# Altium PCB board.PcbDoc
Units mm, origin at the board's own origin, x right, y up, seen from the top; angles counter-clockwise.
Board outline 110 x 110 mm, 2 copper layers (Top Layer, Bottom Layer); 9 components, 6 nets, 43 pads, 1 vias.
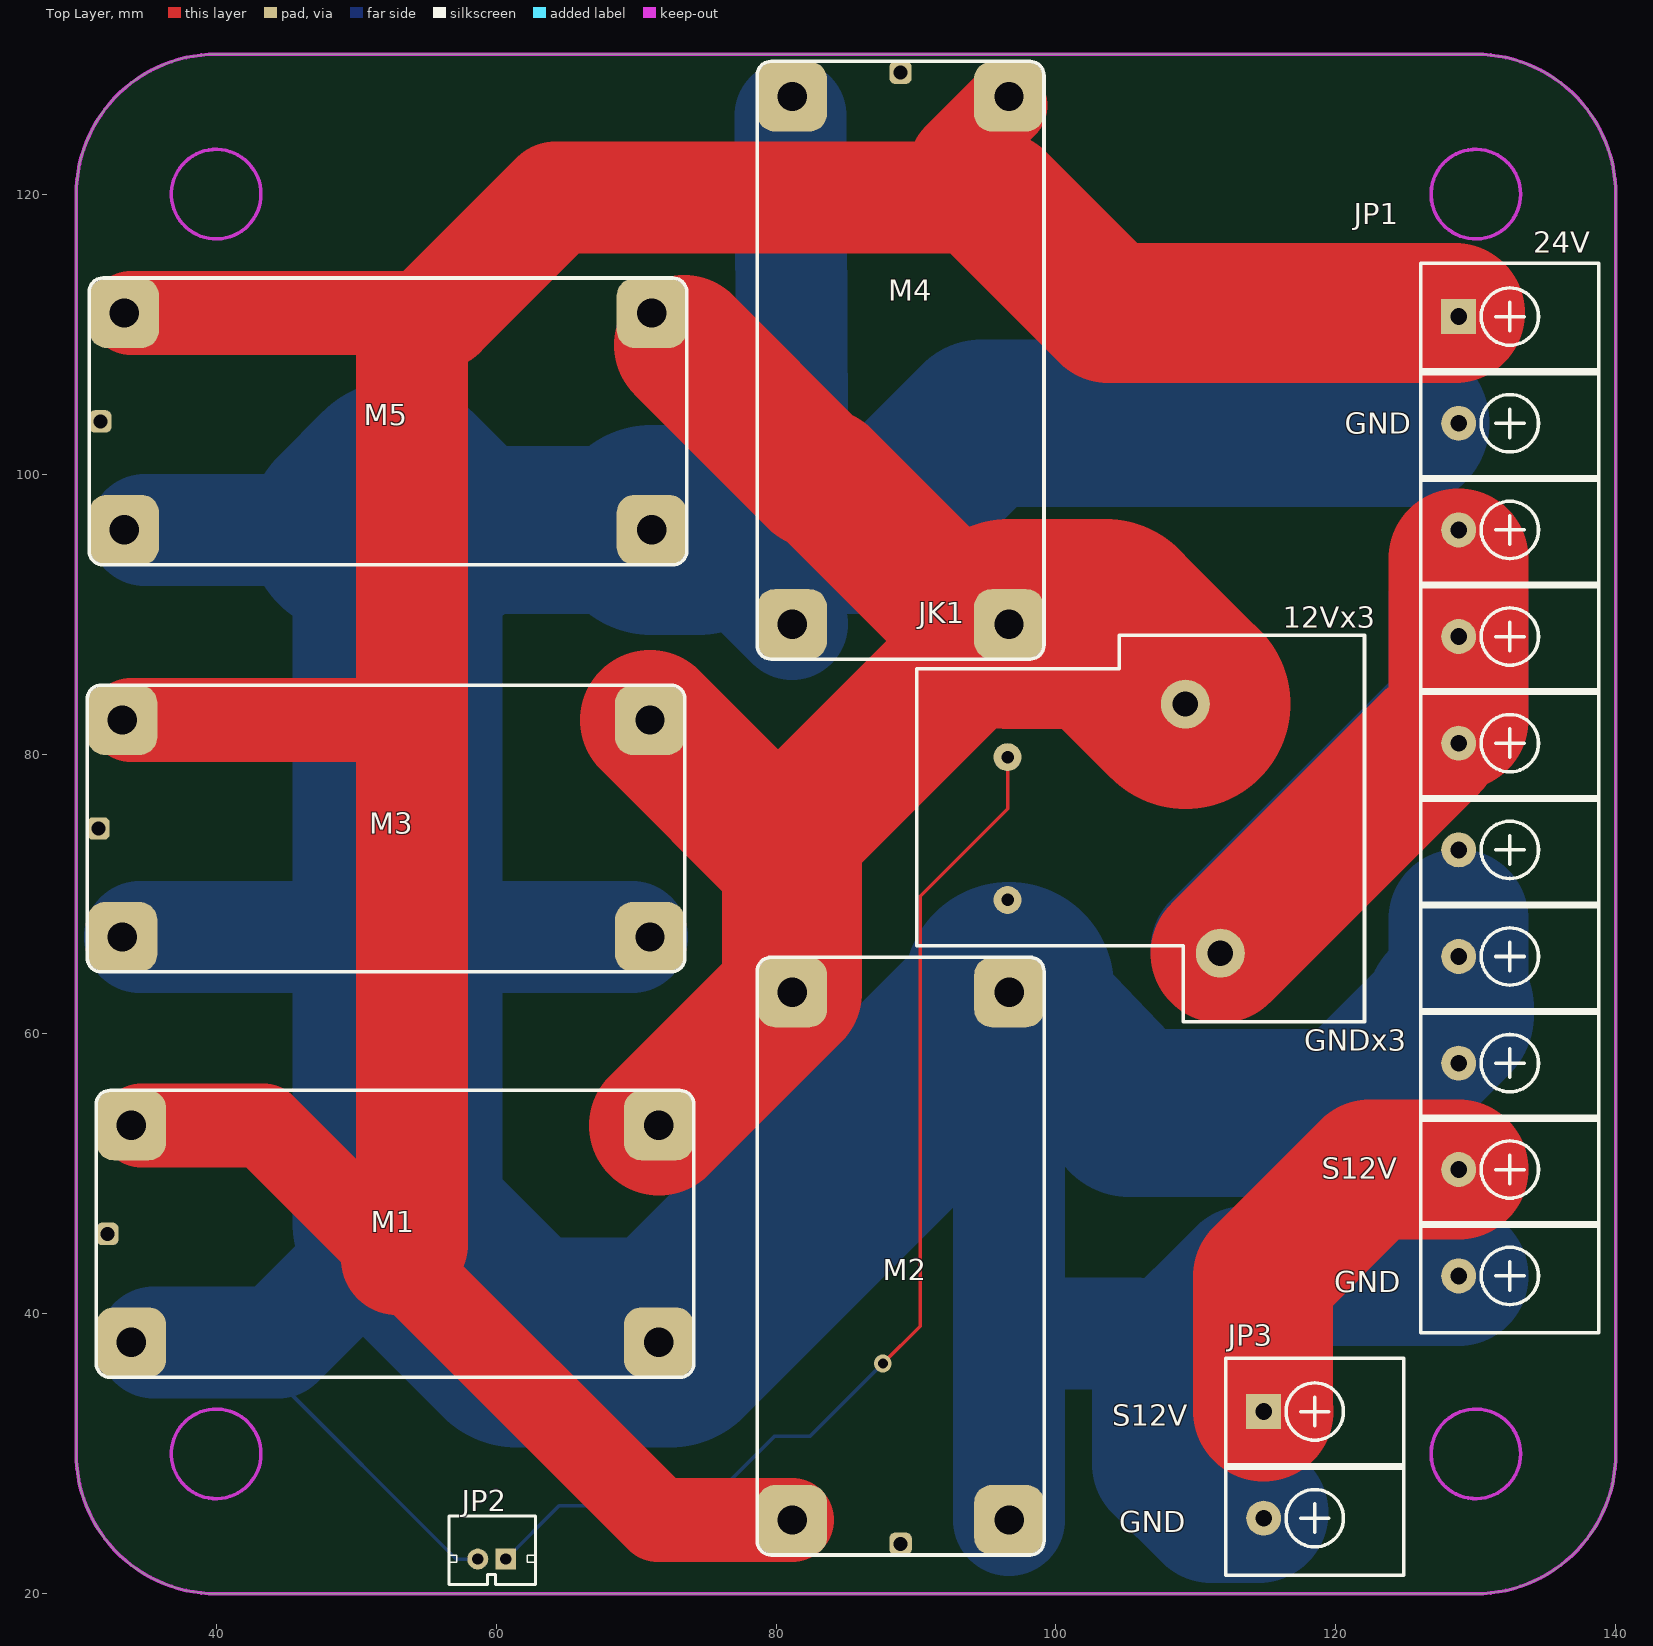
[diagram p0: Top Layer view]
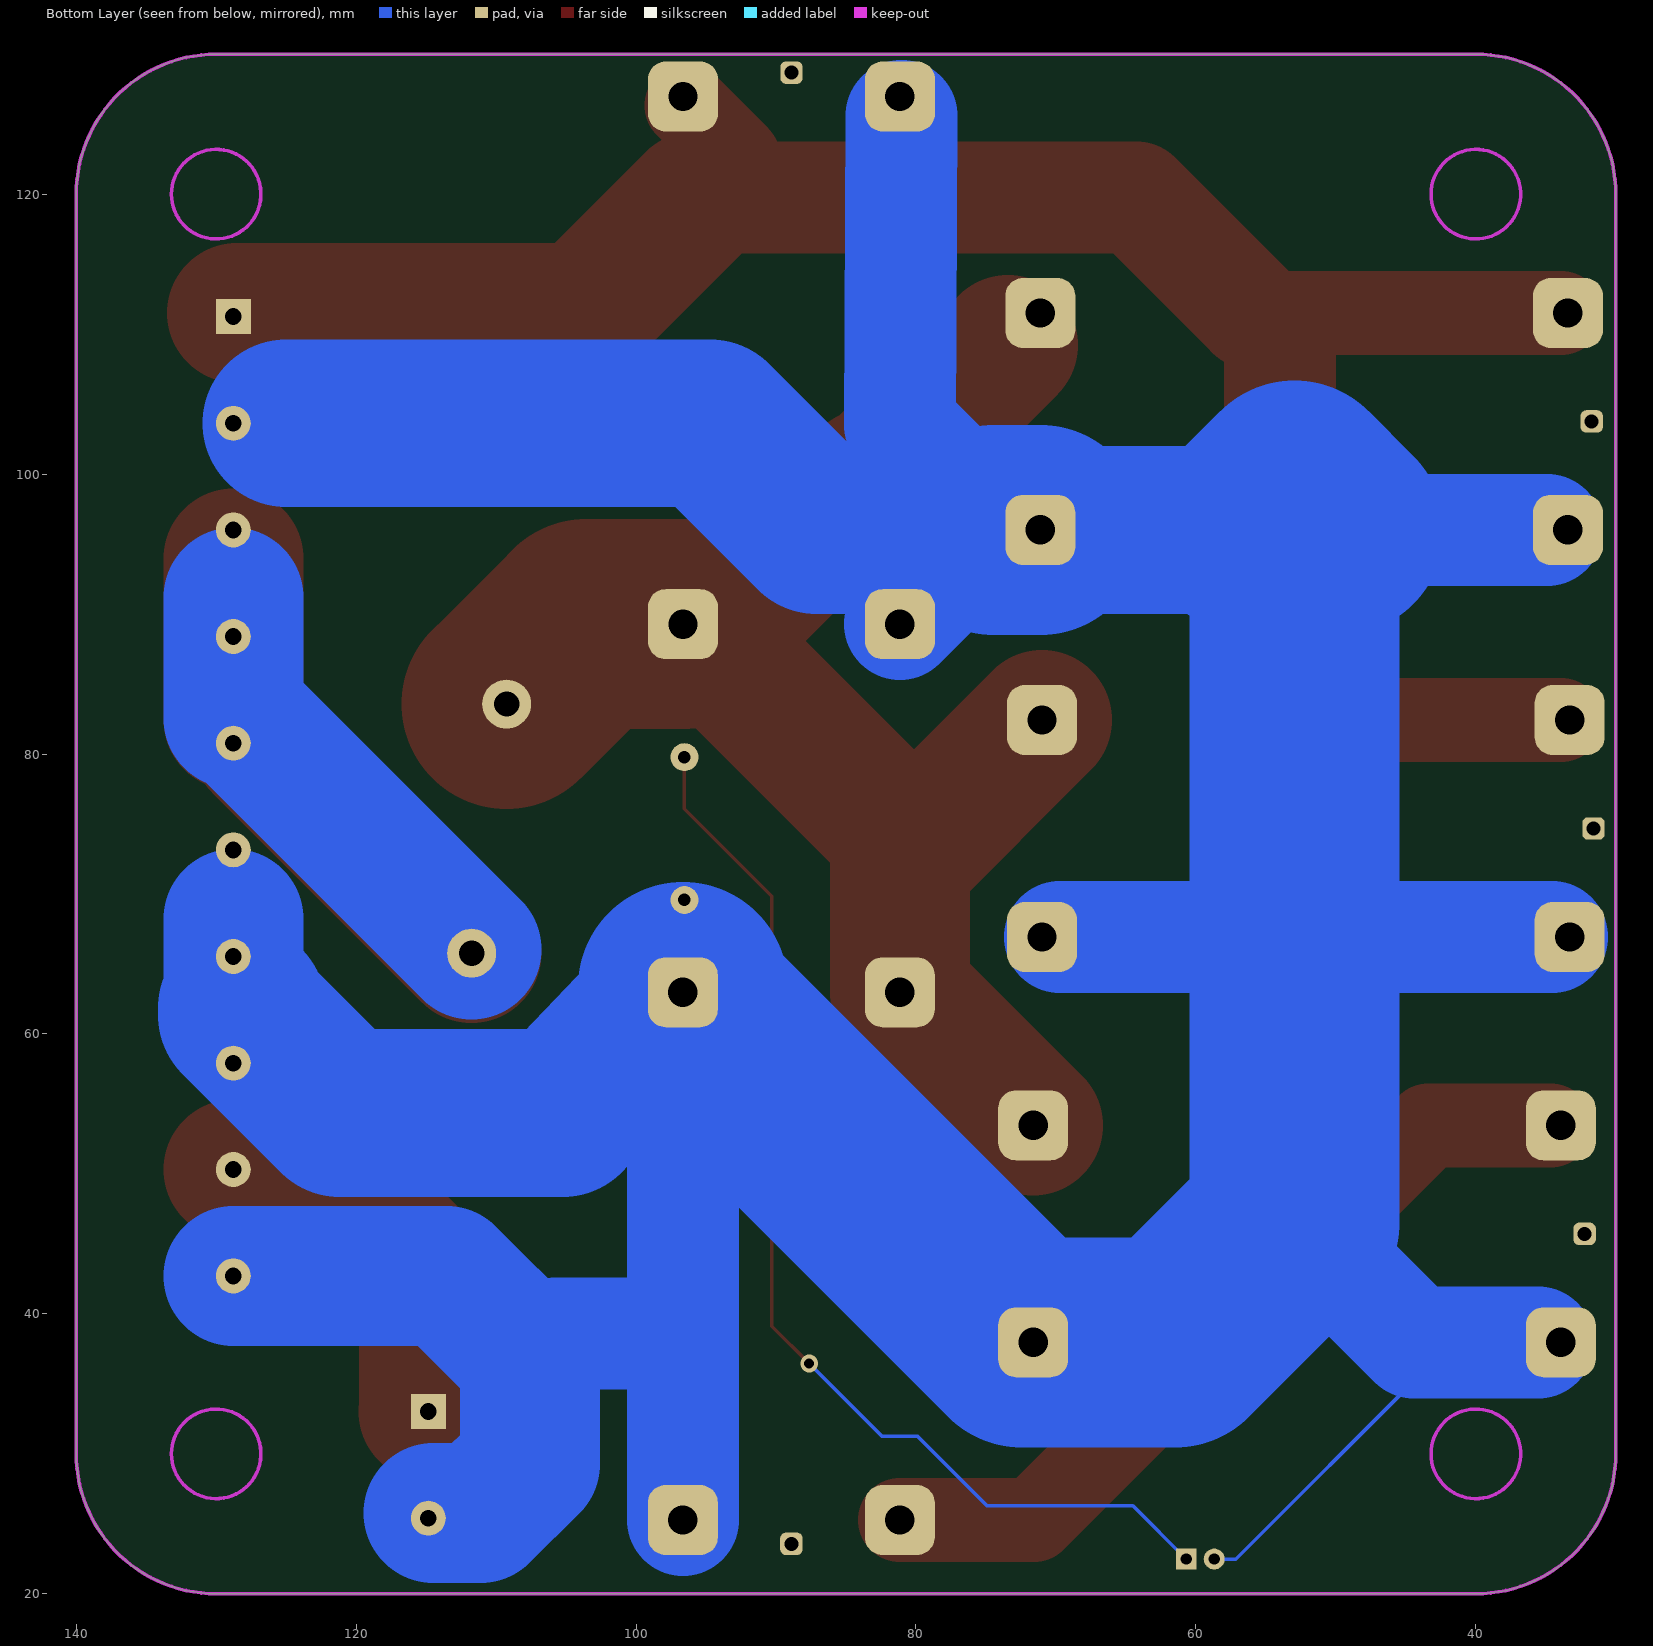
[diagram p1: Bottom Layer view, seen from below]

## Layer stack, top to bottom
Top Solder: solder mask 0.0102, Solder Resist, Dk 3.5
Top Layer: signal copper 0.0356
Dielectric 1: dielectric 0.32, FR-4, Dk 4.8
Bottom Layer: signal copper 0.0356
Bottom Solder: solder mask 0.0102, Solder Resist, Dk 3.5

## Board outline
30,30 ccw(c40,30) 40,20 130,20 ccw(c130,30) 140,30 140,120 ccw(c130,120) 130,130 40,130 ccw(c40,120) 30,120

## Design rules (kind name [scope] priority, off if disabled: settings)
Clearance [All] p1: gap=0.254 ignorepadtopadclearanceinfootprint=FALSE
PolygonConnect [All] p1: connectstyle=Relief reliefconductorwidth=0.254 reliefentries=4 polygonreliefangle="90 Angle" airgapwidth=0.254
RoutingVias [All] p1: holewidth=0.711 width=1.27 viastyle="Through Hole" minholewidth=0.711 minwidth=1.27 maxholewidth=0.711 maxwidth=1.27
SolderMaskExpansion [All] p1: expansion=0.102 istentingtop=FALSE
Width Width_12vin [InNet('NetJK1_3')] p1: maxlimit=50 minlimit=8 preferedwidth=8 minimp=50.000000 maximp=50.000000 favimp=50.000000
Width Width_12vd [InNet('+12d')] p2: maxlimit=50 minlimit=8 preferedwidth=10 minimp=50.000000 maximp=50.000000 favimp=50.000000
Width Width_24v [InNet('+24')] p3: maxlimit=50 minlimit=5 preferedwidth=10 minimp=50.000000 maximp=50.000000 favimp=50.000000
Width Width_gnd [InNet('GND')] p4: maxlimit=50 minlimit=5 preferedwidth=15 minimp=50.000000 maximp=50.000000 favimp=50.000000
Width Width_12v [InNet('+12')] p5: maxlimit=50 minlimit=8 preferedwidth=8 minimp=50.000000 maximp=50.000000 favimp=50.000000
Width [All] p6: maxlimit=50 minlimit=0.254 preferedwidth=0.254 minimp=50.000000 maximp=50.000000 favimp=50.000000
30 further rules are at their usual default settings.

## Components (designator, comment, footprint, x,y, rotation, side; value= is the part's Value field where it differs from the comment)
JK1 "SLA-12VDC-SL-A" SLA-xxVDC-SL-A 106.045,74.676 r270 top
JP1 "HDR-1X10" KF7620-10P 132.428,76.962 r270 top
JP2 "HDR-1X2" PH2.0-LI-2P 59.69,22.479 r180 top
JP3 "HDR-1X2" KF7620-2P 118.491,29.21 r270 top
M1 "PM" PM 31.428,35.467 r0 top
M2 "PM" PM 99.153,22.773 r90 top
M3 "PM" PM 30.793,64.429 r0 top
M4 "PM" PM 78.647,129.481 r270 top
M5 "PM" PM 30.92,93.512 r0 top

## Footprints (in the part's own frame and the unit in brackets; to place one, negate y for a bottom-side part, rotate by r counter-clockwise, add the part's x,y. Pads: shape width x height; smd on the part's side, far side on the other; paste and mask are expansions set on the pad)
KF7620-2P [mm] "15.2*12*12mm(长宽高)"
  rect 2.5x2.5 hole 1.2: 1(-3.81,-3.65)
  round 2.5 hole 1.2: 2(3.81,-3.65)
  silkscreen extent -7.62,-6.35 7.87,6.35, body extent -7.62,-6.2 8.32,6.2, height 12.45
KF7620-10P [mm] "61*12*12mm(长宽高)"
  rect 2.5x2.5 hole 1.2: 1(-34.29,-3.65)
  round 2.5 hole 1.2: 2(-26.67,-3.65) 3(-19.05,-3.65) 4(-11.43,-3.65) 5(-3.81,-3.65) 6(3.81,-3.65) 7(11.43,-3.65) 8(19.05,-3.65) 9(26.65,-3.65) 10(34.25,-3.65)
  silkscreen extent -38.1,-6.35 38.31,6.35, body extent -38.1,-6.2 38.76,6.2, height 12.45
PH2.0-LI-2P [mm] "长：5.9mm，宽：4.7mm，高：6mm"
  rect 1.5x1.5 hole 0.8: 1(-1,0)
  round 1.5 hole 0.8: 2(1,0)
  silkscreen extent -3.13,-3.08 3.06,1.82, body extent -2.95,-3 2.95,1.7, height 6.01
PM [mm]
  rrect50% 5x5 hole 2.1: 1(2.5,18) 3(2.5,2.5) 4(40.2,2.5) 5(40.2,18)
  rrect50% 1.6x1.6 hole 1: 2(0.8,10.25)
  silkscreen extent 0,0 42.7,20.5
SLA-xxVDC-SL-A [mm] "一组常开，长：32mm，宽：27.6mm，高：20mm"
  round 2 hole 0.9: 1(-5.1,-9.5) 2(5.1,-9.5)
  round 3.5 hole 1.8: 3(8.91,5.7) 4(-8.89,3.2)
  silkscreen extent -13.8,-16 13.8,16, body extent -13.8,-16 13.8,16, height 20.65

## Part data
JK1: "12V一组常开", BOM名称=12V继电器, 学习资源=www.ooocke.com, 版权归属=源创客
JP1: library part "Header 10", "10P接插件", BOM名称=10P接插件, 学习资源=www.ooocke.com, 版权归属=源创客
JP2 JP3: library part "Header 2", "2P接插件", BOM名称=2P接插件, 学习资源=www.ooocke.com, 版权归属=源创客

## Via types
v1: diameter 1.27, hole 0.711, Top Layer to Bottom Layer, 1 vias

## Nets (pads, with @x,y where several pads share a name; then routed paths per layer and width w, separated by ;. In a path a pad name is that pad's centre, name@x,y a point inside that pad or via, vN(x,y) a via of type N, cw(c..) or ccw(c..) an arc to the next point about the centre after c; other vN are vias at no path point)
+12: JK1.3 JP1.3 JP1.4 JP1.5 | length 65.3
  Top Layer w10: JK1.3 126.751,80.772 ; 128.778,82.423 JP1.4 128.778,93.98
  Bottom Layer w10: JK1.3@111.745,66.023 128.651,82.929 ; 128.778,82.55 JP1.4 128.778,91.186
+12d: JP1.9 JP3.1 | length 26.8
  Top Layer w10: JP3.1 114.808,33.053 114.808,42.672 122.448,50.312 JP1.9
+24: JP1.1 M1.1 M2.1 M3.1 M4.1 M5.1 | length 251
  Top Layer w6: M3.1@33.909,82.429 53.727,82.429 53.975,82.677 ; M5.1@33.909,111.512 56.013,111.512 ; M1.1@34.671,53.467 43.375,53.467 52.929,43.912 71.569,25.273 M2.1 ; 92.666,122.599 M4.1@96.412,126.346
  Top Layer w8: 52.929,43.912 53.975,44.958 53.975,82.677 53.975,109.474 ; 56.013,111.512 64.262,119.761 95.504,119.761 ; JP1.1@128.524,111.506 JP1.1
  Top Layer w10: 95.784,119.481 103.759,111.506 JP1.1@128.524,111.506
GND: JK1.2 JP1.2 JP1.6 JP1.7 JP1.8 JP1.10 JP2.2 JP3.2 M1.3 M1.4 M2.3 M2.4 M3.3 M3.4 M4.3 M4.4 M5.3 M5.4 | length 459.1
  Bottom Layer w0.254: 43.815,35.814 57.15,22.479 JP2.2
  Bottom Layer w8: M3.3@34.544,66.929 52.832,66.929 ; M5.3@34.925,96.012 49.784,96.012 ; M1.3@35.56,37.967 44.426,37.967 52.959,46.5 ; 52.959,66.929 M3.4@69.723,66.929 ; 73.66,96.012 81.147,103.499 M4.3@81.026,125.603 ; 74.416,96.012 M4.4 ; M2.3 96.653,38.608 ; M2.4@96.653,62.184 96.653,38.608 ; 107.591,36.755 105.738,38.608 96.653,38.608
  Bottom Layer w10: M2.4@96.653,63.354 M2.4@96.843,63.155 ; JP3.2@114.471,25.77 111.106,25.77 107.591,29.285 107.591,36.755 113.548,42.712 JP1.10 ; 128.143,61.849 128.778,62.484 JP1.7 128.778,68.199
  Bottom Layer w12: 56.134,96.012 M5.4 ; 74.416,96.012 87.089,96.012 94.709,103.632 124.968,103.632 ; M2.4@96.843,63.155 105.27,54.356 121.155,54.356 128.143,61.344 128.143,61.849
  Bottom Layer w15: 49.784,96.012 52.959,99.187 ; 52.832,66.929 52.959,66.929 ; 56.134,96.012 52.959,99.187 ; M5.4 73.66,96.012 74.416,96.012 ; M2.4@96.653,63.354 M2.4 96.653,62.184 72.436,37.967 M1.4 61.492,37.967 52.959,46.5 52.959,66.929 ; 52.959,66.929 52.959,99.187
NetJK1_1: JK1.1 JP2.1 | length 79.7
  Top Layer w0.254: v1(87.63,36.449) 90.297,39.116 90.297,69.85 96.545,76.098 JK1.1
  Bottom Layer w0.254: JP2.1 64.5,26.289 74.93,26.289 79.913,31.272 82.453,31.272 v1(87.63,36.449)
NetJK1_4: JK1.4 M1.5 M2.5 M3.5 M4.5 M5.5 | length 106.3
  Top Layer w10: M3.5 81.153,72.269 ; M1.5 71.647,53.467 M2.5 81.153,72.269 ; 73.409,109.223 82.936,99.696 83.311,99.696 93.726,89.281 96.139,89.281 81.153,74.295 81.153,72.269
  Top Layer w15: M4.5 103.53,89.281 JK1.4
pads on no net: M1.2 M2.2 M3.2 M4.2 M5.2
copper on no net: | length 1.9
  Bottom Layer w0.254: 111.994,65.766 111.745,65.766 ; 128.651,82.929 128.651,83.566 ; 111.745,65.766 111.745,66.279 111.745,65.766

## Keep-outs
Keep-Out Layer:
  circle w0.254: c40,120 r3.2
  circle w0.254: c130,120 r3.2
  circle w0.254: c130,30 r3.2
  circle w0.254: c40,30 r3.2
  lines w0.254: 30,30 ccw(c40,30) 40,20 130,20 ccw(c130,30) 140,30 140,120 ccw(c130,120) 130,130 40,130 ccw(c40,120) 30,120 30,30

## Silkscreen, mask and mechanical layers (free items; w line width, h text height)
Top Overlay:
  text "24V" at 134.112,115.824 h1.52
  text "GND" at 120.65,102.87 h1.52
  text "12Vx3" at 116.205,89.027 h1.52
  text "GNDx3" at 117.729,58.801 h1.52
  text "S12V" at 118.999,49.657 h1.52
  text "GND" at 119.888,41.529 h1.52
  text "S12V" at 104.013,32.004 h1.52
  text "GND" at 104.521,24.384 h1.52
Top Solder:
  lines w0.254: 53.721,110.363 55.118,110.363 ; 72.003,111.512 71.12,111.512 72.393,110.239 ; 81.407,74.041 81.153,74.041 81.915,74.041 ; 94.869,120.396 95.504,120.396 ; 104.775,88.036 104.775,89.281 ; 109.245,83.566 109.245,84.811 ; 111.745,65.766 111.994,65.766
  lines w8: 53.848,44.069 53.975,94.488 53.975,110.49 ; 55.118,110.363 64.389,119.634 96.266,119.634 104.521,111.379 128.016,111.379 ; 81.153,62.973 81.153,74.041 ; 81.407,74.041 96.647,89.281 104.775,89.281 109.245,84.811 ; 111.994,65.766 128.778,82.55 128.778,94.488
Bottom Solder:
  lines w0.254: 59.823,37.967 61.601,37.967 ; 72.39,37.973 73.533,37.973 ; 73.025,37.719 74.041,37.719 ; 96.393,54.102 96.653,54.362 ; 96.653,62.973 97.047,62.973 ; 111.745,65.766 111.745,66.025 ; 128.651,61.849 128.651,63.754
  lines w8: 59.823,37.967 52.959,44.831 52.959,95.758 87.63,95.758 94.488,102.616 ; 61.601,37.967 71.628,37.967 87.433,53.772 87.452,53.772 ; 87.884,54.229 121.031,54.229 128.651,61.849 128.651,67.818 ; 94.742,103.505 126.111,103.505 ; 96.653,54.362 96.653,62.973 ; 111.745,66.025 128.651,82.931 ; 128.651,83.185 128.651,93.472